# EAGLE board Eagle OSSM Ref Board PCB V1 (EAGLE 7.5.0)
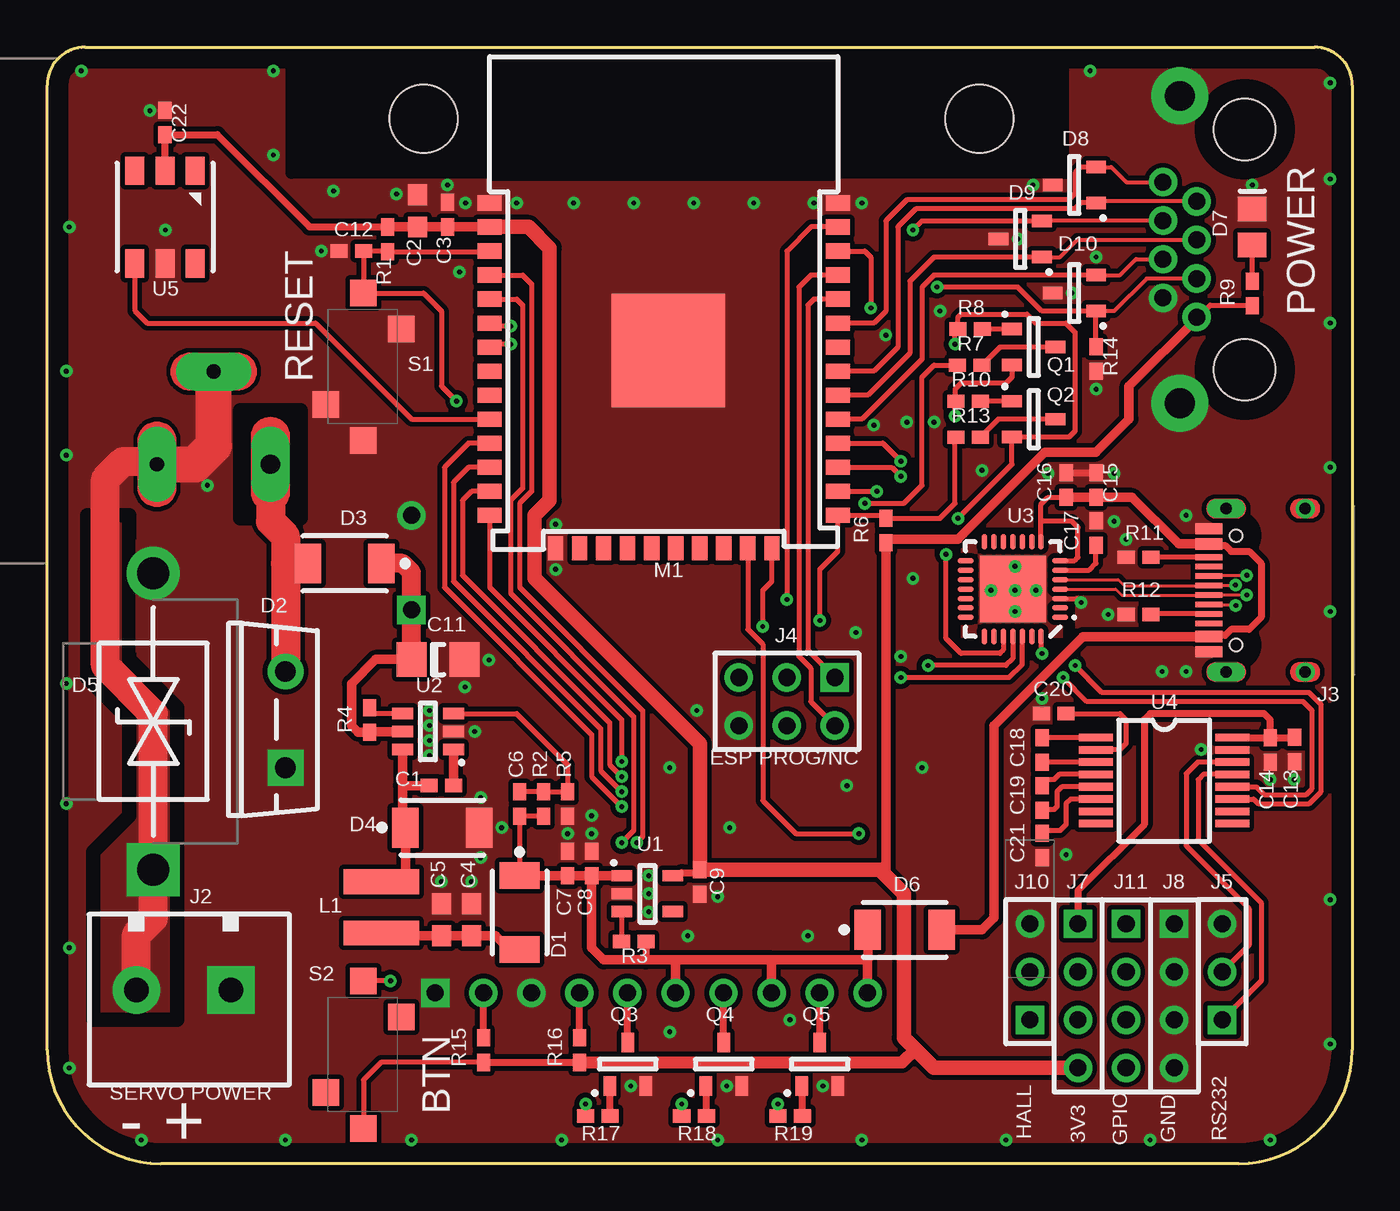
[diagram p0: board, top side]
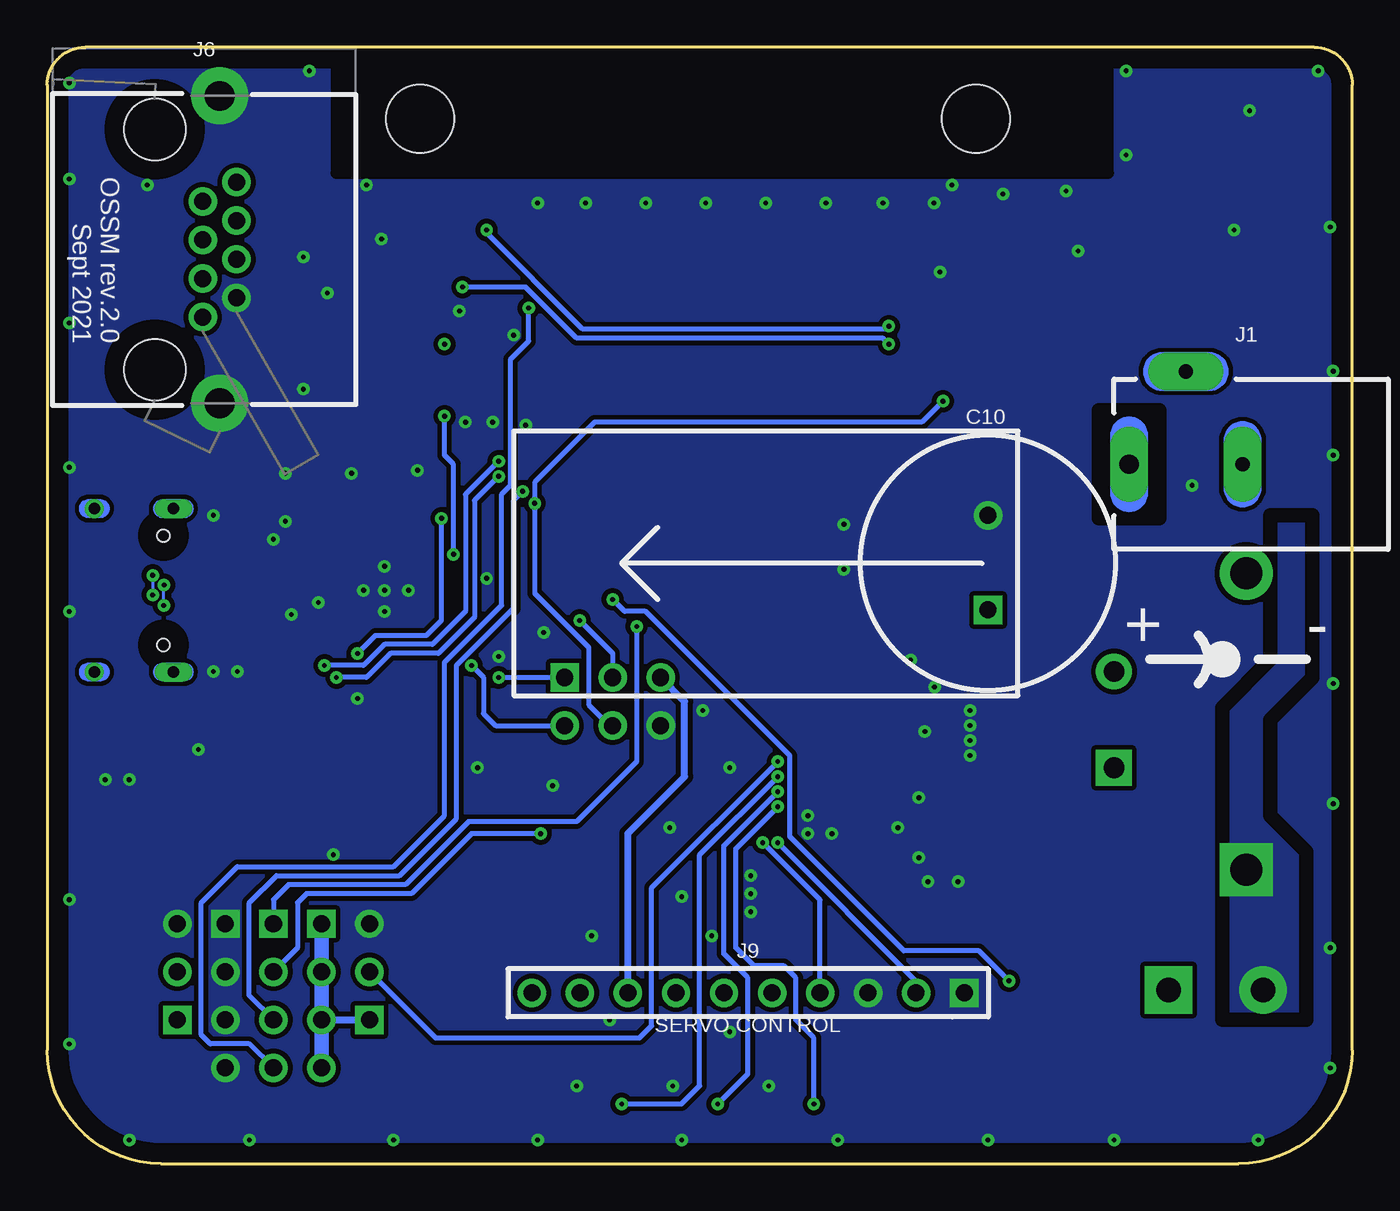
[diagram p1: board, bottom side, seen from below]

Size 69 x 59 mm. Coordinates in mm from the lower left corner, seen from the top.
Outline: 63,0 6,0 arc-90 0,6 0,57 arc-90 2,59 67,59 arc-90 69,57 69,6 arc-90 63,0
Outline: 63,0 63,0
Copper layers (1*16): Top 0.035mm / dielectric 1.5mm / Bottom 0.035mm
Design rules "default *": minimum track width 10mil, minimum drill 0.61mm, track to track 8mil, track to pad 8mil, pad to pad 8mil, via to via 8mil, smd to smd 8mil, copper to edge 40mil, drill to drill 8mil, minimum pad ring 0mil, minimum via ring 8mil, stop-mask expansion 1mil, vias tented up to drill 10mil, thermal gap 10mil
Net classes: 0 Default: width 0.102 mm, clearance 0.152 mm, clearance 0.152 mm to class 1; 1 USB_D: width 0.152 mm, clearance 0.152 mm, clearance 0.152 mm to class 0
Holes 3.6 mm at 19.9,55.22 49.3,55.22
tRestrict: 22 lines
bRestrict: 18 lines

## Footprints (pad centres in the part's own frame; a part is rotated, then mirrored left to right if it is on the bottom)
CAP_0402 = smd 0.9 x 0.7: 1 -0.65,0; 2 0.65,0
CAP_0603 = smd 1.1 x 1: 1 -0.85,0; 2 0.85,0
CAPR-5/13.5h22 = drill 0.9 pad 1.5 square: 1 -2.5,0 | drill 0.9 pad 1.5: 2 2.5,0
CAP_1206 = smd 1.6 x 1.8: 1 -1.4,0; 2 1.4,0
SMA = smd 1.4 x 2.1: 1 -1.95,0; 2 1.95,0
TO-220FP-2 = drill 1.1 pad 1.9 square: 1 -2.54,0 | drill 1.1 pad 1.9: 2 2.54,0
SMA_D3 = smd 1.4 x 2.1: 1 -1.95,0; 2 1.95,0
DO-201AD = drill 1.7 pad 2.8 square: 1 -7.832,0 | drill 1.7 pad 2.8: 2 7.832,0
DIO_0805 = smd 1.3 x 1.5: 1 -0.95,0; 2 0.95,0
SOT23 = smd 1.05 x 0.65: 1 -1.15,0.95; 2 -1.15,-0.95; 3 1.15,0
RAPC722X = drill 1.02 pad 2 long: 1 3,1.7 | drill 0.76 pad 2 long: 2 -3,1.7; 3 0,-3.2
TB-1x2/5/11x9/Sc_H = drill 1.3 pad 2.5 square: 1 -2.5,0 | drill 1.3 pad 2.5: 2 2.5,0
TYPE-C-31-M-12 = smd 0.6 x 1.45: A1B12 -3.25,5.095; A4B9 -2.45,5.095; B1A12 3.25,5.095; B4A9 2.45,5.095 | smd 0.3 x 1.45: A5 -1.25,5.095; A6 -0.25,5.095; A7 0.25,5.095; A8 1.25,5.095; B5 1.75,5.095; B6 0.75,5.095; B7 -0.75,5.095; B8 -1.75,5.095 | drill 0.6 pad 1: GND1 4.32,0; GND4 -4.32,0 | drill 0.6 pad 1 long: GND2 4.32,4.18; GND3 -4.32,4.18 | hole 0.65: -2.89,3.65; 2.89,3.65
HDR-2x3 = drill 0.9 pad 1.5 square: 1 -2.54,-1.27 | drill 0.9 pad 1.5: 2 -2.54,1.27; 3 0,-1.27; 4 0,1.27; 5 2.54,-1.27; 6 2.54,1.27
HDR-1x3 = drill 0.9 pad 1.5 square: 1 -2.54,0 | drill 0.9 pad 1.5: 2 0,0; 3 2.54,0
DS1128-06-S8B0P-X = drill 0.9 pad 1.5: 1 3.57,2.54; 2 2.55,4.32; 3 1.53,2.54; 4 0.51,4.32; 5 -0.51,2.54; 6 -1.53,4.32; 7 -2.55,2.54; 8 -3.57,4.32 | drill 1.57 pad 3: 9 -8.125,3.43; 10 8.125,3.43 | hole 3.25: -6.35,0; 6.35,0
HDR-1x4 = drill 0.9 pad 1.5 square: 1 -3.81,0 | drill 0.9 pad 1.5: 2 -1.27,0; 3 1.27,0; 4 3.81,0
HDR-1x10 = drill 0.9 pad 1.5 square: 1 -11.43,0 | drill 0.9 pad 1.5: 2 -8.89,0; 3 -6.35,0; 4 -3.81,0; 5 -1.27,0; 6 1.27,0; 7 3.81,0; 8 6.35,0; 9 8.89,0; 10 11.43,0
VLS4012E = smd 1.3 x 4: 1 -1.35,0; 2 1.35,0
ESP-WROOM-32 = smd 1.27 x 0.8: 1 -9.207,9.246; 2 -9.207,7.976; 3 -9.207,6.706; 4 -9.207,5.436; 5 -9.207,4.166; 6 -9.207,2.896; 7 -9.207,1.626; 8 -9.207,0.356; 9 -9.207,-0.914; 10 -9.207,-2.184; 11 -9.207,-3.454; 12 -9.207,-4.724; 13 -9.207,-5.994; 14 -9.207,-7.264; 25 9.207,-7.264; 26 9.207,-5.994; 27 9.207,-4.724; 28 9.207,-3.454; 29 9.207,-2.184; 30 9.207,-0.914; 31 9.207,0.356; 32 9.207,1.626; 33 9.207,2.896; 34 9.207,4.166; 35 9.207,5.436; 36 9.207,6.706; 37 9.207,7.976; 38 9.207,9.246 | smd 0.8 x 1.27: 15 -5.715,-9.011; 16 -4.445,-9.011; 17 -3.175,-9.011; 18 -1.905,-9.011; 19 -0.635,-9.011; 20 0.635,-9.011; 21 1.905,-9.011; 22 3.175,-9.011; 23 4.445,-9.011; 24 5.715,-9.011 | smd 6 x 6: 39 0.251,1.448
RES_0402 = smd 0.9 x 0.7: 1 -0.65,0; 2 0.65,0
Sunrom_1P1T_switch = smd 1.4 x 1.4: 1 -3.9,0; 2 3.9,0; 3 2,-2; 4 -2,2
SOT23-5 = smd 1.1 x 0.6: 1 -1.35,0.95; 2 -1.35,0; 3 -1.35,-0.95; 4 1.35,-0.95; 5 1.35,0.95
SOT23-6 = smd 1.1 x 0.6: 1 -1.35,0.95; 2 -1.35,0; 3 -1.35,-0.95; 4 1.35,-0.95; 5 1.35,0; 6 1.35,0.95
QFN-28/5x5x0.5 = smd 0.85 x 0.3: 1 -2.5,1.5; 2 -2.5,1; 3 -2.5,0.5; 4 -2.5,0; 5 -2.5,-0.5; 6 -2.5,-1; 7 -2.5,-1.5; 15 2.5,-1.5; 16 2.5,-1; 17 2.5,-0.5; 18 2.5,0; 19 2.5,0.5; 20 2.5,1; 21 2.5,1.5 | smd 0.3 x 0.85: 8 -1.5,-2.5; 9 -1,-2.5; 10 -0.5,-2.5; 11 0,-2.5; 12 0.5,-2.5; 13 1,-2.5; 14 1.5,-2.5; 22 1.5,2.5; 23 1,2.5; 24 0.5,2.5; 25 0,2.5; 26 -0.5,2.5; 27 -1,2.5; 28 -1.5,2.5 | smd 3.5 x 3.5: 29 0,0
SSOP-16 = smd 1.8 x 0.4: 1 -3.6,2.275; 2 -3.6,1.625; 3 -3.6,0.975; 4 -3.6,0.325; 5 -3.6,-0.325; 6 -3.6,-0.975; 7 -3.6,-1.625; 8 -3.6,-2.275; 9 3.6,-2.275; 10 3.6,-1.625; 11 3.6,-0.975; 12 3.6,-0.325; 13 3.6,0.325; 14 3.6,0.975; 15 3.6,1.625; 16 3.6,2.275
WS2813 = smd 1.5 x 1: 1 -2.45,1.6; 2 -2.45,0; 3 -2.45,-1.6; 4 2.45,-1.6; 5 2.45,0; 6 2.45,1.6

## Placement (x,y rotation side)
C1  100nF  [CAP_0402]  20.83,19.97 180 top
C2  10uF  [CAP_0603]  19.58,50.35 90 top
C3  100nF  [CAP_0402]  21.17,50.15 90 top
C4  10uF  [CAP_0603]  22.44,12.89 90 top
C5  10uF  [CAP_0603]  20.85,12.89 90 top
C6  22pF  [CAP_0402]  24.98,19.01 90 top
C7  1uF  [CAP_0402]  27.52,15.86 90 top
C8  100nF  [CAP_0402]  28.79,15.86 90 top
C9  1uF  [CAP_0402]  34.5,14.88 270 top
C10  1000uF/50V  [CAPR-5/13.5h22]  19.26,31.76 90 bottom
C11  470nF  [CAP_1206]  20.66,26.64 0 top
C12  10uF  [CAP_0402]  16.07,48.23 180 top
C13  1uF  [CAP_0402]  65.95,21.88 270 top
C14  100nF  [CAP_0402]  64.66,21.86 270 top
C15  1uF  [CAP_0402]  55.46,35.86 90 top
C16  100nF  [CAP_0402]  53.87,35.86 90 top
C17  100nF  [CAP_0402]  55.46,33.32 90 top
C18  100nF  [CAP_0402]  52.6,21.86 270 top
C19  100nF  [CAP_0402]  52.6,19.32 270 top
C20  100nF  [CAP_0402]  53.22,23.78 180 top
C21  100nF  [CAP_0402]  52.6,16.81 90 top
C22  1uF  [CAP_0402]  6.22,55.03 90 top
D1  B1100  [SMA]  24.98,13.26 270 top
D2  ST1060  [TO-220FP-2]  12.59,23.47 90 top
D3  B1100  [SMA_D3]  15.72,31.72 180 top
D4  B1100  [SMA_D3]  20.89,17.75 0 top
D5  42V CLAMP  [DO-201AD]  5.61,23.36 90 top
D6  B1100  [SMA_D3]  45.34,12.35 0 top
D7  POWER  [DIO_0805]  63.71,49.5 270 top
D8  PESD1CAN 215  [SOT23]  54.31,51.72 180 top
D9  PESD1CAN 215  [SOT23]  51.45,48.86 180 top
D10  PESD1CAN 215  [SOT23]  54.31,46.01 180 top
J1  24/36V IN  [RAPC722X]  8.8,38.66 180 bottom
J2  SERVO POWER  [TB-1x2/5/11x9/Sc_H]  7.21,9.17 180 top
J3  TYPE-C-31-M-12  [TYPE-C-31-M-12]  66.51,30.3 90 top
J4  ESP PROG/NC  [HDR-2x3]  39.1,24.42 180 top
J5  RS232  [HDR-1x3]  62.12,10.13 90 top
J6  RJ45  [DS1128-06-S8B0P-X]  63.32,48.31 270 bottom
J7  3V3  [HDR-1x4]  54.5,8.86 270 top
J8  GND  [HDR-1x4]  59.58,8.86 270 top
J9  SERVO CONTROL  [HDR-1x10]  31.95,9.01 180 bottom
J10  HALL  [HDR-1x3]  51.96,10.13 90 top
J11  GPIO  [HDR-1x4]  57.04,8.86 270 top
Keepout_1  1  [ROUTE_KEEPOUT_1]  33.31,55.53 0 top
Keepout_2  2  [ROUTE_KEEPOUT_2]  4.66,7.59 0 top
Keepout_3  3  [ROUTE_KEEPOUT_3]  6.88,15.85 0 top
Keepout_4  4  [ROUTE_KEEPOUT_4]  5.61,25.37 0 top
Keepout_5  5  [ROUTE_KEEPOUT_5]  4.34,30.45 0 top
Keepout_6  6  [ROUTE_KEEPOUT_6]  3.23,34.26 0 top
Keepout_7  7  [ROUTE_KEEPOUT_7]  2.12,29.98 0 top
Keepout_8  8  [ROUTE_KEEPOUT_8]  3.23,24.58 0 top
Keepout_9  9  [ROUTE_KEEPOUT_9]  4.34,20.93 0 top
Keepout_10  10  [ROUTE_KEEPOUT_10]  3.39,17.43 0 top
Keepout_11  11  [ROUTE_KEEPOUT_11]  2.43,12.04 0 top
Keepout_12  12  [ROUTE_KEEPOUT_12]  11.8,36.96 0 top
L1  10uH  [VLS4012E]  17.67,13.54 270 top
M1  ESP32-WROOM-32D  [ESP-WROOM-32]  32.6,41.53 0 top
Q1  BC817  [SOT23]  52.16,43.15 0 top
Q2  BC817  [SOT23]  52.16,39.34 0 top
Q3  BC817  [SOT23]  30.69,5.25 90 top
Q4  BC817  [SOT23]  35.77,5.25 90 top
Q5  BC817  [SOT23]  40.85,5.25 90 top
R1  10K  [RES_0402]  17.99,48.85 270 top
R2  54.9K  [RES_0402]  26.25,19.01 270 top
R3  10K  [RES_0402]  31.01,11.73 0 top
R4  10K  [RES_0402]  17.04,23.45 270 top
R5  10K  [RES_0402]  27.52,19.01 90 top
R6  10K  [RES_0402]  44.34,33.45 270 top
R7  100R  [RES_0402]  48.77,42.2 180 top
R8  10K  [RES_0402]  48.8,44.1 0 top
R9  220R  [RES_0402]  63.71,45.99 270 top
R10  10K  [RES_0402]  48.69,40.29 0 top
R11  5.1K  [RES_0402]  57.69,32.04 0 top
R12  5.1K  [RES_0402]  57.69,29.02 0 top
R13  100R  [RES_0402]  48.69,38.39 180 top
R14  10K  [RES_0402]  55.46,42.53 90 top
R15  10K  [RES_0402]  23.07,5.99 270 top
R16  10K  [RES_0402]  28.15,5.99 270 top
R17  220R  [RES_0402]  29.12,2.51 180 top
R18  220R  [RES_0402]  34.2,2.51 180 top
R19  220R  [RES_0402]  39.28,2.51 180 top
S1  K2-1107ST-A4SW-06  [Sunrom_1P1T_switch]  16.72,42.11 270 top
S2  K2-1107ST-A4SW-06  [Sunrom_1P1T_switch]  16.72,5.76 270 top
U1  ME6211C33  [SOT23-5]  31.72,14.26 0 top
U2  LMR14006  [SOT23-6]  20.13,22.83 180 top
U3  CP2102  [QFN-28/5x5x0.5]  51.05,30.36 180 top
U4  SP3232E  [SSOP-16]  59.06,20.24 0 top
U5  WS2813  [WS2813]  6.23,50.03 270 top

## Library data of the parts
C1-C9 C11-C22 D8-D10 J1-J5 J7 J8 J10 J11 Keepout_1-Keepout_12 R1-R19 U2-U5 = common
C10 = common; DESCRIPTION: Fixed Capacitor
D1-D4 D6 = common; ATTR_1: Schottky; DESCRIPTION: Diode
D5 = common; ATTR_1: Voltage Suppressor; DESCRIPTION: Diode
D7 = common; DESCRIPTION: LED
J6 = common; DATASHEET: http://datasheets.diptrace.com/con_jacks/43202.pdf; MANUFACTURER: Molex
J9 = common; DATASHEET: http://datasheets.diptrace.com/con_terminal_blocks/ostvnxxa150.pdf; MANUFACTURER: On Shore Technology
L1 = common; ATTR_1: Ferrite Core; ATTR_2: Fixed; DESCRIPTION: Inductor
M1 = common; MANUFACTURER: Espressif
Q1-Q5 = common; DESCRIPTION: Bipolar NPN
S1 S2 = common; ATTR_1: SPST; ATTR_2: Normally Open; DESCRIPTION: Switch
U1 = common; ALTERNATE: ME6211C

## Nets
!DIR: M1.12 R18.2
!ENA: M1.11 R17.2
!PUL: M1.13 R19.2
ALM: J9.2 M1.5 R15.1
ANA1: D10.1 J6.3 M1.7 R14.2
ANA2: D9.2 J6.6 M1.6
ESP_EN: C12.1 J4.4 M1.3 R1.2 R7.2 S1.1
ESP_RXD: J4.1 M1.34 U3.26
ESP_TXD: J4.2 M1.35 U3.25
GND: C2.2 C3.2 C4.2 C5.2 C7.2 C8.2 C9.2 C10.2 C11.2 C12.2 C13.2 C14.2 C15.2 C16.2 C17.2 C20.2 C21.1 C22.2 D4.2 D5.1 D7.1 D8.3 D9.3 D10.3 J1.2 J1.3 J2.2 J3.A1B12 J3.B1A12 J3.GND1 J3.GND2 J3.GND3 J3.GND4 J4.6 J5.3 J6.2 J6.9 J6.10 J8.1 J8.2 J8.3 J8.4 J9.1 J9.3 J10.3 M1.1 M1.15 M1.38 M1.39 Q3.2 Q4.2 Q5.2 R5.1 R11.1 R12.1 R14.1 S1.2 S1.3 S1.4 U1.2 U2.2 U3.3 U3.29 U4.15 U5.5
HALL: J10.2 M1.14
IO0: J4.3 M1.25 R6.1 R13.2
IO2: J11.1 M1.24
IO4: J11.3 M1.26
IO15: J11.2 M1.23
IO22: J11.4 M1.36
Net_0: D2.2 D3.2 J1.1
Net_3: C4.1 C5.1 D1.2 L1.2
Net_6: Q1.1 R8.2
Net_12: C17.1 U3.6
Net_23: Q2.1 R10.2
Net_24: R3.1 U1.3
Net_25: Q1.2 R10.1 U3.24
Net_26: Q2.2 R8.1 U3.28
Net_32: R4.1 U2.4
Net_33: C1.1 U2.1
Net_34: C1.2 D4.1 L1.1 U2.6
Net_35: C6.2 R2.1 R5.2 U2.3
Net_37: J9.9 Q5.3
Net_38: J9.7 Q4.3
Net_39: J9.5 Q3.3
Net_40: Q3.1 R17.1
Net_41: Q4.1 R18.1
Net_42: Q5.1 R19.1
Net_47: C18.1 U4.1
Net_48: C18.2 U4.3
Net_49: C19.1 U4.4
Net_50: C19.2 U4.5
Net_52: J5.1 U4.13
Net_53: J5.2 U4.14
Net_54: C20.1 U4.2
Net_60: D2.1 D5.2 J2.1
Net_61: C21.2 U4.6
Net_62: D7.2 R9.1
Net_74: J3.B5 R11.2
Net_75: J3.A5 R12.2
Net_76: Q2.3 R13.1
Net_77: Q1.3 R7.1
PED: J9.4 M1.4 R16.1
REM_GPIO1: D10.2 J6.4 M1.29
REM_GPIO2: D9.1 J6.5 M1.30
REM_I2C_SCL: D8.1 J6.7 M1.31
REM_I2C_SDA: D8.2 J6.8 M1.33
RGB: M1.10 U5.4
RS232_RXD: M1.27 U4.12
RS232_TXD: M1.28 U4.11
SW: M1.37 S2.1
USB_D_N [USB_D]: J3.A7 J3.B7 U3.5
USB_D_P [USB_D]: J3.A6 J3.B6 U3.4
VDD_3V3: C2.1 C3.1 C9.1 C13.1 C14.1 C22.1 J6.1 J7.1 J7.2 J7.3 J7.4 J10.1 M1.2 R1.1 R6.2 R9.2 R15.2 R16.2 S2.2 U1.5 U4.16 U5.2
VDD_5V0: C6.1 C7.1 C8.1 D1.1 D6.1 J4.5 J9.6 J9.8 J9.10 R2.2 R3.2 U1.1
VDD_36V: C10.1 C11.1 D3.1 R4.2 U2.5
VDD_USB: C15.1 C16.1 D6.2 J3.A4B9 J3.B4A9 U3.7 U3.8

## Tracks (layer width: path | path; a pad name or v marks a point on that pad's centre or on a via)
!DIR  (via drill 0.25 pad 0.56)
  Top 0.254: M1.12 22.28,36.8 21.48,36.01 21.48,30.77 29.26,22.99 29.26,20.77 v30.37,19.66 | v33.55,3.15 R18.2
  Bottom 0.254: v33.55,3.15 31.96,4.74 31.96,9.81 33.23,11.08 33.23,16.8 v30.37,19.66
!ENA  (via drill 0.25 pad 0.56)
  Top 0.254: M1.11 22.28,38.07 21.01,36.8 21.01,30.45 28.79,22.67 28.79,20.45 v30.37,18.86 | v28.47,3.15 R17.2
  Bottom 0.254: v28.47,3.15 28.47,6.64 29.42,7.59 29.42,9.81 30.06,10.45 31.64,10.45 32.6,11.4 32.6,16.64 v30.37,18.86
!PUL  (via drill 0.25 pad 0.56)
  Top 0.254: M1.13 22.44,35.53 21.96,35.06 21.96,31.09 29.74,23.31 29.74,21.09 v30.37,20.45 | v38.63,3.15 R19.2
  Bottom 0.254: v38.63,3.15 35.45,3.15 34.5,4.1 34.5,16.32 v30.37,20.45
ALM  (via drill 0.25 pad 0.56)
  Top 0.254: M1.5 24.82,45.69 25.13,45.38 25.13,35.69 24.5,35.06 24.5,30.14 31.01,23.63 31.01,17.59 v30.37,16.96
  Top 0.381: R15.1 J9.2
  Bottom 0.254: J9.2 23.06,9.64 v30.37,16.96
ANA1  (via drill 0.25 pad 0.56)
  Top 0.203: J6.3 58.13,46.78 56.41,45.06 D10.1
  Top 0.254: v24.5,43.31 23.39,43.31 M1.7 | v47.04,46.33 51.33,46.33 52.6,45.06 D10.1 R14.2
  Bottom 0.254: v24.5,43.31 24.82,43.63 41.01,43.63 43.71,46.33 v47.04,46.33
ANA2  (via drill 0.25 pad 0.56)
  Top 0.203: J6.6 52.62,49.84 D9.2
  Top 0.254: v24.5,44.26 23.39,44.26 M1.6 | D9.2 46.24,49.82 v45.77,49.34
  Bottom 0.254: v24.5,44.26 24.5,44.11 40.69,44.11 45.93,49.34 v45.77,49.34
ESP_EN  (via drill 0.25 pad 0.56)
  Top 0.254: M1.3 23.36,48.2 R1.2 17.99,48.23 C12.1 S1.1 19.9,46.01 20.85,45.06 20.85,41.09 v21.64,40.29 | v43.23,34.9 45.3,34.9 46.25,35.85 46.25,41.57 46.88,42.2 R7.2
  Bottom 0.254: J4.4 39.1,22.99 40.37,24.26 40.37,27.28 43.23,30.14 v43.23,34.9 43.23,36.01 40.06,39.18 22.75,39.18 v21.64,40.29
ESP_RXD  (via drill 0.25 pad 0.56)
  Top 0.254: M1.34 40.53,45.69 40.22,45.38 40.22,27.12 J4.1 | v45.14,25.69 | v45.14,25.69 50.85,25.69 51.55,26.39 U3.26
  Bottom 0.254: v45.14,25.69 J4.1 | J4.1
ESP_TXD  (via drill 0.25 pad 0.56)
  Top 0.254: M1.35 40.37,46.96 39.74,46.33 39.74,26.8 40.37,26.17 40.37,24.42 J4.2 | U3.25 51.05,26.68 50.69,26.32 v46.56,26.32
  Bottom 0.254: v46.56,26.32 45.93,25.69 45.93,23.78 45.3,23.15 J4.2
GND  (via drill 0.25 pad 0.56)
  Top 0.254: U3.3 54.45,29.86 v54.66,29.66
  Top 0.381: C16.2 C15.2
  Top 0.508: U3.29 | U3.29 v51.17,30.29 | v51.17,30.29
  Top 1.524: J1.2 5.64,37.12 4.02,37.12 3.07,36.17 3.07,26.32 5.61,23.78 D5.1 5.61,12.99 4.71,12.09 J2.2
  Top 1.905: J1.2 7.83,36.96 8.8,37.93 J1.3
  other vias: 52.12,51.72 54.19,46.01 51.33,48.87 20.21,21.56 20.21,22.36 20.21,23.15 20.21,23.94 22.44,14.89 20.85,14.89 22.91,16.16 24.02,17.75 22.91,19.34 22.59,22.83 31.8,15.21 31.8,14.26 31.8,13.31 28.79,18.39 34.34,23.94 33.87,12.04 27.52,17.43 28.79,17.43 14.5,48.23 18.47,51.25 21.17,51.72 57.04,32.99 56.09,29.02 56.41,36.48 52.92,36.48 52.28,30.29 51.17,31.56 51.17,29.18 49.9,30.29 56.41,33.94 35.93,4.1 41.01,4.1 30.85,4.1 55.46,47.91 5.42,55.65 6.24,49.34 44.34,43.79 22.12,50.77 64.66,20.29 65.93,20.29 52.6,24.58 53.87,16.32 61.01,21.88 23.36,26.61 22.09,25.18 55.46,40.93 26.88,33.79 26.88,31.4 43.07,50.77 40.53,50.77 45.14,26.8 42.28,19.97 42.76,28.07 45.77,30.93 45.45,39.18 46.88,39.18 49.42,36.64 47.2,45.06 21.8,47.12 24.82,50.77 43.71,39.02 1.8,57.76 1.16,49.5 1,41.88 1,37.44 1,25.37 1,19.02 1.16,11.4 1.16,5.05 11.96,57.76 11.96,53.31 15.13,51.41 8.47,35.85 4.97,1.24 12.59,1.24 19.26,1.24 27.2,1.24 35.45,1.24 43.07,1.24 50.69,1.24 58.31,1.24 64.66,1.24 67.84,6.32 67.84,13.94 27.83,50.77 67.84,29.18 67.84,36.8 67.84,44.42 67.84,52.04 67.84,57.12 31.01,50.77 34.18,50.77 37.36,50.77 46.25,20.93 60.22,34.26 60.22,26.01 58.95,26.01 32.91,6.96 39.26,7.59 55.14,57.76 32.91,20.93 40.22,12.04 63.71,51.72 36.09,17.75 35.45,14.1
  pour Bottom (isolate 0.254): 62.98,0.63 6.03,0.63 5.16,0.7 4.34,0.9 3.57,1.22 2.85,1.66 2.21,2.21 1.66,2.85 1.22,3.56 0.9,4.34 0.7,5.16 0.64,6.02 0.64,56.96 0.69,57.35 0.82,57.68 1.04,57.96 1.32,58.18 1.65,58.31 2.04,58.36 66.96,58.36 67.35,58.31 67.68,58.18 67.96,57.96 68.18,57.68 68.31,57.35 68.37,56.96 68.37,6.02 68.3,5.16 68.1,4.34 67.78,3.56 67.34,2.85 66.79,2.21 66.15,1.66 65.44,1.22 64.66,0.9 63.84,0.7
  pour Top (isolate 0.254): 62.98,0.63 6.03,0.63 5.16,0.7 4.34,0.9 3.57,1.22 2.85,1.66 2.21,2.21 1.66,2.85 1.22,3.56 0.9,4.34 0.7,5.16 0.64,6.02 0.64,56.96 0.69,57.35 0.82,57.68 1.04,57.96 1.32,58.18 1.65,58.31 2.04,58.36 66.96,58.36 67.35,58.31 67.68,58.18 67.96,57.96 68.18,57.68 68.31,57.35 68.37,56.96 68.37,6.02 68.3,5.16 68.1,4.34 67.78,3.56 67.34,2.85 66.79,2.21 66.15,1.66 65.44,1.22 64.66,0.9 63.84,0.7
HALL  (via drill 0.25 pad 0.56)
  Top 0.254: M1.14 23.39,30.45 30.37,23.47 v30.37,21.25
  Bottom 0.254: J10.2 48.47,6.64 37.67,6.64 37.04,7.28 37.04,14.58 v30.37,21.25
IO0  (via drill 0.25 pad 0.56)
  Top 0.254: R13.2 47.99,38.35 47.99,34.9 47.2,34.1 R6.1 44.34,34.26 M1.25 41.8,32.36 40.85,31.41 v40.85,28.71
  Bottom 0.254: v40.85,28.71 | v40.85,28.71 39.1,26.96 J4.3
IO2  (via drill 0.25 pad 0.56)
  Top 0.254: v37.83,28.39 37.83,30.29 38.31,30.77 M1.24
  Bottom 0.254: v37.83,28.39 | v37.83,28.39 37.83,21.25 41.01,18.07 46.72,18.07 50.06,14.74 56.25,14.74 57.04,13.94 J11.1
IO4  (via drill 0.25 pad 0.56)
  Top 0.254: M1.26 v43.87,35.53 | v43.87,35.53
  Bottom 0.254: J11.3 58.31,8.86 58.31,13.78 56.88,15.21 50.38,15.21 47.36,18.23 47.36,26.32 44.34,29.34 44.34,35.06 v43.87,35.53
IO15  (via drill 0.25 pad 0.56)
  Top 0.254: M1.23 37.04,28.23 37.83,27.44 37.83,19.18 39.58,17.43 v42.91,17.43
  Bottom 0.254: v42.91,17.43 46.56,17.43 49.74,14.26 55.3,14.26 55.77,13.78 55.77,11.4 J11.2
IO22  (via drill 0.25 pad 0.56)
  Top 0.254: M1.36 43.23,48.23 43.55,47.91 v43.55,45.22
  Bottom 0.254: J11.4 58.31,6.32 60.38,6.32 60.85,6.8 60.85,13.78 58.95,15.69 50.69,15.69 47.99,18.39 47.99,26.48 44.98,29.5 44.98,35.37 44.5,35.85 44.5,42.52 43.55,43.47 v43.55,45.22
Net_0
  Top 1.016: D3.2 12.59,31.72
  Top 1.524: J1.1 11.8,33.95 12.59,33.15 12.59,31.72 D2.2
Net_3
  Top 0.508: L1.2 17.83,12.04 C5.1 C4.1 | C4.1 | C4.1 23.71,12.04 24.43,11.31 D1.2
Net_6
  Top 0.254: Q1.1 R8.2 | R8.2
Net_12
  Top 0.254: U3.6 55.1,31.36 55.45,31.72 C17.1
Net_23
  Top 0.254: Q2.1 R10.2 | R10.2
Net_24
  Top 0.254: U1.3 30.37,11.75 R3.1
Net_25  (via drill 0.25 pad 0.56)
  Top 0.254: Q1.2 51.01,41.56 50.69,41.25 48.31,41.25 47.99,40.93 47.99,40.34 R10.1 47.99,40.25 v47.99,39.5 | U3.24 50.55,27.13 50.38,26.96 48.31,26.96 47.52,27.75 v47.52,32.2
  Bottom 0.254: v47.52,32.2 47.52,36.96 47.99,37.44 v47.99,39.5
Net_26  (via drill 0.25 pad 0.56)
  Top 0.254: v47.99,43.31 47.99,43.95 R8.1 48.15,44.74 48.31,44.9 51.8,44.9 52.28,44.42 53.87,44.42 54.34,43.95 54.34,38.71 54.03,38.39 Q2.2 51.01,36.96 v48.15,34.1 | U3.28 52.55,27.01 v52.6,26.96
  Bottom 0.254: v52.6,26.96 51.65,27.91 48.95,27.91 48.15,28.71 v48.15,34.1
Net_32
  Top 0.254: U2.4 17.36,23.78 R4.1
Net_33
  Top 0.508: C1.1 U2.1
Net_34
  Top 0.508: U2.6 18.78,19.98 | 18.78,19.98 18.78,17.91 D4.1 18.94,15.21 18.63,14.89 L1.1 | C1.2 18.78,19.98
Net_35
  Top 0.254: C6.2 R2.1 R5.2 | C6.2 | R5.2 | U2.3 24.82,23.78 27.52,21.09 R5.2
Net_37
  Top 0.381: Q5.3 40.85,9 J9.9
Net_38
  Top 0.381: Q4.3 35.77,9 J9.7
Net_39
  Top 0.381: Q3.3 30.69,9 J9.5
Net_40
  Top 0.381: R17.1 29.77,4.1 Q3.1
Net_41
  Top 0.381: R18.1 34.85,4.1 Q4.1
Net_42
  Top 0.381: R19.1 39.93,4.1 Q5.1
Net_47
  Top 0.254: U4.1 C18.1 | C18.1
Net_48
  Top 0.254: U4.3 C18.2 | C18.2
Net_49
  Top 0.254: U4.4 53.51,20.57 53.23,20.29 52.6,20.29 C19.1
Net_50
  Top 0.254: U4.5 53.65,19.91 53.39,19.66 53.39,18.86 53.23,18.71 52.63,18.71 C19.2
Net_52
  Top 0.254: U4.13 61.13,20.57 60.85,20.29 60.85,17.12 64.19,13.78 64.19,9.66 J5.1
Net_53
  Top 0.254: U4.14 60.82,21.21 60.22,20.61 60.22,16.8 63.55,13.47 63.55,11.56 J5.2
Net_54
  Top 0.254: C20.1 56.73,23.78 57.04,23.47 57.04,22.2 56.71,21.86 U4.2
Net_60
  pour Top (isolate 0.203): 4.44,32.89 9.95,32.89 9.95,23.47 9.96,23.43 9.98,23.4 10.01,23.37 10.05,23.37 14.4,23.37 14.4,7.69 7.61,7.69 7.61,24.79 4.44,27.33
Net_61
  Top 0.254: U4.6 54.11,19.27 53.87,19.02 53.87,17.91 53.55,17.59 52.73,17.59 C21.2
Net_62
  Top 0.254: R9.1 D7.2
Net_74
  Top 0.254: J3.B5 R11.2
Net_75
  Top 0.254: J3.A5 58.37,29.05 R12.2
Net_76
  Top 0.254: Q2.3 50.29,39.34 R13.1
Net_77
  Top 0.254: Q1.3 50.38,43.15 R7.1
PED  (via drill 0.25 pad 0.56)
  Top 0.254: M1.4 25.13,46.96 25.61,46.49 25.61,35.53 24.98,34.9 24.98,30.45 31.48,23.94 31.48,17.28 v31.17,16.96
  Top 0.381: R16.1 28.15,9 J9.4
  Bottom 0.254: J9.4 28.14,13.93 v31.17,16.96
REM_GPIO1
  Top 0.203: D10.2 56.72,46.96 57.56,47.8 J6.4
  Top 0.254: D10.2 46.88,46.96 46.25,46.33 46.25,42.52 43.07,39.34 M1.29
REM_GPIO2
  Top 0.203: D9.1 53.55,47.91 54.45,48.82 J6.5
  Top 0.254: D9.1 46.88,47.91 45.61,46.64 45.61,42.83 43.39,40.61 M1.30
REM_I2C_SCL
  Top 0.203: J6.7 55.54,50.86 D8.1
  Top 0.254: D8.1 54.66,50.77 54.34,50.45 45.93,50.45 44.98,49.5 44.98,43.15 43.71,41.88 M1.31
REM_I2C_SDA
  Top 0.203: D8.2 56.25,52.67 57.05,51.88 J6.8
  Top 0.254: D8.2 54.66,52.67 54.34,52.36 54.34,51.25 54.03,50.93 45.45,50.93 44.34,49.82 44.34,45.06 43.71,44.42 M1.33
RGB
  Top 0.254: U5.4 4.63,45.08 5.29,44.42 14.18,44.42 19.26,39.34 M1.10
RS232_RXD  (via drill 0.25 pad 0.56)
  Top 0.254: U4.12 63.93,19.91 64.35,19.5 66.57,19.5 66.89,19.82 66.89,23.94 66.41,24.42 54.98,24.42 v53.71,25.69 | M1.27 44.66,36.8 v45.14,36.33
  Bottom 0.254: v45.14,36.33 46.41,35.06 46.41,28.86 48.31,26.96 50.85,26.96 52.12,25.69 v53.71,25.69
RS232_TXD  (via drill 0.25 pad 0.56)
  Top 0.254: U4.11 63.79,19.27 64.03,19.02 66.73,19.02 67.36,19.66 67.36,24.26 66.73,24.9 55.77,24.9 v54.34,26.32 | M1.28 44.18,38.07 v45.14,37.12
  Bottom 0.254: v45.14,37.12 46.88,35.37 46.88,29.18 48.63,27.44 51.17,27.44 52.28,26.32 v54.34,26.32
SW  (via drill 0.25 pad 0.56)
  Top 0.254: M1.37 40.37,49.5 39.1,48.23 v39.1,29.82 | v18.15,9.66 S2.1 | S2.1
  Bottom 0.254: v18.15,9.66 19.74,11.24 23.71,11.24 29.74,17.28 29.74,21.56 37.36,29.18 38.47,29.18 v39.1,29.82
USB_D_N  (via drill 0.25 pad 0.56)
  Top 0.152: U3.5 56.63,30.86 56.95,30.55 J3.A7 61.43,30.53 62.77,30.53 v62.82,30.58 | v62.84,29.5 61.47,29.5 J3.B7
  Bottom 0.152: v62.84,29.5 62.84,30.56 v62.82,30.58
USB_D_P  (via drill 0.25 pad 0.56)
  Top 0.152: U3.4 56.49,30.36 56.81,30.05 J3.A6 v63.42,30.05 | J3.B6 61.42,31.09 v63.42,31.09
  Bottom 0.152: v63.42,31.09 v63.42,30.05 | v63.42,30.05 | v63.42,30.05 | v63.42,30.05 | v63.42,30.05 | v63.42,30.05 | v63.42,30.05 | v63.42,30.05 | v63.42,30.05 | v63.42,30.05 | v63.42,30.05 | v63.42,30.05 | v63.42,30.05 | v63.42,30.05 | v63.42,30.05 | v63.42,30.05 | v63.42,30.05 | v63.42,30.05 | v63.42,30.05 | v63.42,30.05 | v63.42,30.05 | v63.42,30.05 | v63.42,30.05 | v63.42,30.05 | v63.42,30.05 | v63.42,30.05 | v63.42,30.05 | v63.42,30.05 | v63.42,30.05 | v63.42,30.05 | v63.42,30.05 | v63.42,30.05 | v63.42,30.05 | v63.42,30.05 | v63.42,30.05 | v63.42,30.05 | v63.42,30.05 | v63.42,30.05 | v63.42,30.05 | v63.42,30.05 | v63.42,30.05 | v63.42,30.05 | v63.42,30.05 | v63.42,30.05 | v63.42,30.05 | v63.42,30.05 | v63.42,30.05 | v63.42,30.05 | v63.42,30.05 | v63.42,30.05 | v63.42,30.05 | v63.42,30.05 | v63.42,30.05 | v63.42,30.05 | v63.42,30.05 | v63.42,30.05 | v63.42,30.05 | v63.42,30.05 | v63.42,30.05 | v63.42,30.05 | v63.42,30.05 | v63.42,30.05 | v63.42,30.05 | v63.42,30.05 | v63.42,30.05 | v63.42,30.05 | v63.42,30.05 | v63.42,30.05 | v63.42,30.05 | v63.42,30.05 | v63.42,30.05 | v63.42,30.05 | v63.42,30.05 | v63.42,30.05 | v63.42,30.05 | v63.42,30.05 | v63.42,30.05 | v63.42,30.05 | v63.42,30.05 | v63.42,30.05 | v63.42,30.05 | v63.42,30.05 | v63.42,30.05 | v63.42,30.05 | v63.42,30.05 | v63.42,30.05 | v63.42,30.05 | v63.42,30.05 | v63.42,30.05 | v63.42,30.05 | v63.42,30.05 | v63.42,30.05 | v63.42,30.05 | v63.42,30.05 | v63.42,30.05 | v63.42,30.05 | v63.42,30.05 | v63.42,30.05 | v63.42,30.05 | v63.42,30.05 | v63.42,30.05 | v63.42,30.05 | v63.42,30.05 | v63.42,30.05 | v63.42,30.05 | v63.42,30.05 | v63.42,30.05 | v63.42,30.05 | v63.42,30.05 | v63.42,30.05 | v63.42,30.05 | v63.42,30.05 | v63.42,30.05 | v63.42,30.05 | v63.42,30.05 | v63.42,30.05 | v63.42,30.05 | v63.42,30.05 | v63.42,30.05 | v63.42,30.05 | v63.42,30.05 | v63.42,30.05 | v63.42,30.05 | v63.42,30.05
  Bottom 0.152: v63.42,30.05 | v63.42,30.05 | v63.42,30.05 | v63.42,30.05 | v63.42,30.05 | v63.42,30.05 | v63.42,30.05 | v63.42,30.05 | v63.42,30.05 | v63.42,30.05 | v63.42,30.05 | v63.42,30.05 | v63.42,30.05 | v63.42,30.05 | v63.42,30.05 | v63.42,30.05 | v63.42,30.05 | v63.42,30.05 | v63.42,30.05 | v63.42,30.05 | v63.42,30.05 | v63.42,30.05 | v63.42,30.05 | v63.42,30.05 | v63.42,30.05 | v63.42,30.05 | v63.42,30.05 | v63.42,30.05 | v63.42,30.05 | v63.42,30.05 | v63.42,30.05 | v63.42,30.05 | v63.42,30.05 | v63.42,30.05 | v63.42,30.05 | v63.42,30.05 | v63.42,30.05 | v63.42,30.05 | v63.42,30.05 | v63.42,30.05 | v63.42,30.05 | v63.42,30.05 | v63.42,30.05 | v63.42,30.05 | v63.42,30.05 | v63.42,30.05 | v63.42,30.05 | v63.42,30.05 | v63.42,30.05 | v63.42,30.05 | v63.42,30.05 | v63.42,30.05 | v63.42,30.05 | v63.42,30.05 | v63.42,30.05 | v63.42,30.05 | v63.42,30.05 | v63.42,30.05 | v63.42,30.05 | v63.42,30.05 | v63.42,30.05 | v63.42,30.05 | v63.42,30.05 | v63.42,30.05 | v63.42,30.05 | v63.42,30.05 | v63.42,30.05 | v63.42,30.05 | v63.42,30.05 | v63.42,30.05 | v63.42,30.05 | v63.42,30.05 | v63.42,30.05 | v63.42,30.05 | v63.42,30.05 | v63.42,30.05 | v63.42,30.05 | v63.42,30.05 | v63.42,30.05 | v63.42,30.05 | v63.42,30.05 | v63.42,30.05 | v63.42,30.05 | v63.42,30.05 | v63.42,30.05 | v63.42,30.05 | v63.42,30.05 | v63.42,30.05 | v63.42,30.05 | v63.42,30.05 | v63.42,30.05 | v63.42,30.05 | v63.42,30.05 | v63.42,30.05 | v63.42,30.05 | v63.42,30.05 | v63.42,30.05 | v63.42,30.05 | v63.42,30.05 | v63.42,30.05 | v63.42,30.05 | v63.42,30.05 | v63.42,30.05 | v63.42,30.05 | v63.42,30.05 | v63.42,30.05 | v63.42,30.05 | v63.42,30.05 | v63.42,30.05 | v63.42,30.05 | v63.42,30.05 | v63.42,30.05 | v63.42,30.05 | v63.42,30.05 | v63.42,30.05 | v63.42,30.05 | v63.42,30.05 | v63.42,30.05 | v63.42,30.05 | v63.42,30.05 | v63.42,30.05 | v63.42,30.05 | v63.42,30.05 | v63.42,30.05 | v63.42,30.05 | v63.42,30.05
  Bottom 0.152: v63.42,30.05 | v63.42,30.05 | v63.42,30.05 | v63.42,30.05 | v63.42,30.05 | v63.42,30.05 | v63.42,30.05 | v63.42,30.05 | v63.42,30.05 | v63.42,30.05 | v63.42,30.05 | v63.42,30.05 | v63.42,30.05 | v63.42,30.05 | v63.42,30.05 | v63.42,30.05 | v63.42,30.05 | v63.42,30.05 | v63.42,30.05 | v63.42,30.05 | v63.42,30.05 | v63.42,30.05 | v63.42,30.05 | v63.42,30.05 | v63.42,30.05 | v63.42,30.05 | v63.42,30.05 | v63.42,30.05 | v63.42,30.05 | v63.42,30.05 | v63.42,30.05 | v63.42,30.05 | v63.42,30.05 | v63.42,30.05 | v63.42,30.05 | v63.42,30.05 | v63.42,30.05 | v63.42,30.05 | v63.42,30.05 | v63.42,30.05 | v63.42,30.05 | v63.42,30.05 | v63.42,30.05 | v63.42,30.05 | v63.42,30.05 | v63.42,30.05 | v63.42,30.05 | v63.42,30.05 | v63.42,30.05 | v63.42,30.05 | v63.42,30.05 | v63.42,30.05 | v63.42,30.05 | v63.42,30.05 | v63.42,30.05 | v63.42,30.05 | v63.42,30.05 | v63.42,30.05 | v63.42,30.05 | v63.42,30.05 | v63.42,30.05 | v63.42,30.05 | v63.42,30.05 | v63.42,30.05 | v63.42,30.05 | v63.42,30.05 | v63.42,30.05 | v63.42,30.05 | v63.42,30.05 | v63.42,30.05 | v63.42,30.05 | v63.42,30.05 | v63.42,30.05 | v63.42,30.05 | v63.42,30.05 | v63.42,30.05 | v63.42,30.05 | v63.42,30.05 | v63.42,30.05 | v63.42,30.05 | v63.42,30.05 | v63.42,30.05 | v63.42,30.05 | v63.42,30.05 | v63.42,30.05 | v63.42,30.05 | v63.42,30.05 | v63.42,30.05 | v63.42,30.05 | v63.42,30.05 | v63.42,30.05 | v63.42,30.05 | v63.42,30.05 | v63.42,30.05 | v63.42,30.05 | v63.42,30.05 | v63.42,30.05 | v63.42,30.05 | v63.42,30.05 | v63.42,30.05 | v63.42,30.05 | v63.42,30.05 | v63.42,30.05 | v63.42,30.05 | v63.42,30.05 | v63.42,30.05 | v63.42,30.05 | v63.42,30.05 | v63.42,30.05 | v63.42,30.05 | v63.42,30.05 | v63.42,30.05 | v63.42,30.05 | v63.42,30.05 | v63.42,30.05 | v63.42,30.05 | v63.42,30.05 | v63.42,30.05 | v63.42,30.05 | v63.42,30.05 | v63.42,30.05 | v63.42,30.05 | v63.42,30.05 | v63.42,30.05 | v63.42,30.05 | v63.42,30.05
  Bottom 0.152: v63.42,30.05 | v63.42,30.05 | v63.42,30.05 | v63.42,30.05 | v63.42,30.05 | v63.42,30.05 | v63.42,30.05 | v63.42,30.05 | v63.42,30.05 | v63.42,30.05 | v63.42,30.05 | v63.42,30.05 | v63.42,30.05 | v63.42,30.05 | v63.42,30.05 | v63.42,30.05 | v63.42,30.05 | v63.42,30.05 | v63.42,30.05 | v63.42,30.05 | v63.42,30.05 | v63.42,30.05 | v63.42,30.05 | v63.42,30.05 | v63.42,30.05 | v63.42,30.05 | v63.42,30.05 | v63.42,30.05 | v63.42,30.05 | v63.42,30.05 | v63.42,30.05 | v63.42,30.05 | v63.42,30.05 | v63.42,30.05 | v63.42,30.05 | v63.42,30.05 | v63.42,30.05 | v63.42,30.05 | v63.42,30.05 | v63.42,30.05 | v63.42,30.05 | v63.42,30.05 | v63.42,30.05 | v63.42,30.05 | v63.42,30.05 | v63.42,30.05 | v63.42,30.05 | v63.42,30.05 | v63.42,30.05 | v63.42,30.05 | v63.42,30.05 | v63.42,30.05 | v63.42,30.05 | v63.42,30.05 | v63.42,30.05 | v63.42,30.05 | v63.42,30.05 | v63.42,30.05 | v63.42,30.05 | v63.42,30.05 | v63.42,30.05 | v63.42,30.05 | v63.42,30.05 | v63.42,30.05 | v63.42,30.05 | v63.42,30.05 | v63.42,30.05 | v63.42,30.05 | v63.42,30.05 | v63.42,30.05 | v63.42,30.05 | v63.42,30.05 | v63.42,30.05 | v63.42,30.05 | v63.42,30.05 | v63.42,30.05 | v63.42,30.05 | v63.42,30.05 | v63.42,30.05 | v63.42,30.05 | v63.42,30.05 | v63.42,30.05 | v63.42,30.05 | v63.42,30.05 | v63.42,30.05 | v63.42,30.05 | v63.42,30.05 | v63.42,30.05 | v63.42,30.05 | v63.42,30.05 | v63.42,30.05 | v63.42,30.05 | v63.42,30.05 | v63.42,30.05 | v63.42,30.05 | v63.42,30.05 | v63.42,30.05 | v63.42,30.05 | v63.42,30.05 | v63.42,30.05 | v63.42,30.05 | v63.42,30.05 | v63.42,30.05 | v63.42,30.05 | v63.42,30.05 | v63.42,30.05 | v63.42,30.05 | v63.42,30.05 | v63.42,30.05 | v63.42,30.05 | v63.42,30.05 | v63.42,30.05 | v63.42,30.05 | v63.42,30.05 | v63.42,30.05 | v63.42,30.05 | v63.42,30.05 | v63.42,30.05 | v63.42,30.05 | v63.42,30.05 | v63.42,30.05 | v63.42,30.05 | v63.42,30.05 | v63.42,30.05 | v63.42,30.05 | v63.42,30.05
  Bottom 0.152: v63.42,30.05 | v63.42,30.05 | v63.42,30.05 | v63.42,30.05 | v63.42,30.05 | v63.42,30.05 | v63.42,30.05 | v63.42,30.05 | v63.42,30.05 | v63.42,30.05 | v63.42,30.05 | v63.42,30.05 | v63.42,30.05 | v63.42,30.05 | v63.42,30.05 | v63.42,30.05 | v63.42,30.05 | v63.42,30.05 | v63.42,30.05 | v63.42,30.05 | v63.42,30.05 | v63.42,30.05 | v63.42,30.05 | v63.42,30.05 | v63.42,30.05 | v63.42,30.05 | v63.42,30.05 | v63.42,30.05 | v63.42,30.05 | v63.42,30.05 | v63.42,30.05 | v63.42,30.05 | v63.42,30.05 | v63.42,30.05 | v63.42,30.05 | v63.42,30.05 | v63.42,30.05 | v63.42,30.05 | v63.42,30.05 | v63.42,30.05 | v63.42,30.05 | v63.42,30.05 | v63.42,30.05 | v63.42,30.05 | v63.42,30.05 | v63.42,30.05 | v63.42,30.05 | v63.42,30.05 | v63.42,30.05 | v63.42,30.05 | v63.42,30.05 | v63.42,30.05 | v63.42,30.05 | v63.42,30.05 | v63.42,30.05 | v63.42,30.05 | v63.42,30.05 | v63.42,30.05 | v63.42,30.05 | v63.42,30.05 | v63.42,30.05 | v63.42,30.05 | v63.42,30.05 | v63.42,30.05 | v63.42,30.05 | v63.42,30.05 | v63.42,30.05 | v63.42,30.05 | v63.42,30.05 | v63.42,30.05 | v63.42,30.05 | v63.42,30.05 | v63.42,30.05 | v63.42,30.05 | v63.42,30.05 | v63.42,30.05 | v63.42,30.05 | v63.42,30.05 | v63.42,30.05 | v63.42,30.05 | v63.42,30.05 | v63.42,30.05 | v63.42,30.05 | v63.42,30.05 | v63.42,30.05 | v63.42,30.05 | v63.42,30.05 | v63.42,30.05 | v63.42,30.05 | v63.42,30.05 | v63.42,30.05 | v63.42,30.05 | v63.42,30.05 | v63.42,30.05 | v63.42,30.05 | v63.42,30.05 | v63.42,30.05 | v63.42,30.05 | v63.42,30.05 | v63.42,30.05 | v63.42,30.05 | v63.42,30.05 | v63.42,30.05 | v63.42,30.05 | v63.42,30.05 | v63.42,30.05 | v63.42,30.05 | v63.42,30.05 | v63.42,30.05 | v63.42,30.05 | v63.42,30.05 | v63.42,30.05 | v63.42,30.05 | v63.42,30.05 | v63.42,30.05 | v63.42,30.05 | v63.42,30.05 | v63.42,30.05 | v63.42,30.05 | v63.42,30.05 | v63.42,30.05 | v63.42,30.05 | v63.42,30.05 | v63.42,30.05 | v63.42,30.05 | v63.42,30.05
  Bottom 0.152: v63.42,30.05 | v63.42,30.05 | v63.42,30.05 | v63.42,30.05 | v63.42,30.05 | v63.42,30.05 | v63.42,30.05 | v63.42,30.05 | v63.42,30.05 | v63.42,30.05 | v63.42,30.05 | v63.42,30.05 | v63.42,30.05 | v63.42,30.05 | v63.42,30.05 | v63.42,30.05 | v63.42,30.05 | v63.42,30.05 | v63.42,30.05 | v63.42,30.05 | v63.42,30.05 | v63.42,30.05 | v63.42,30.05 | v63.42,30.05 | v63.42,30.05 | v63.42,30.05 | v63.42,30.05 | v63.42,30.05 | v63.42,30.05 | v63.42,30.05 | v63.42,30.05 | v63.42,30.05 | v63.42,30.05 | v63.42,30.05 | v63.42,30.05 | v63.42,30.05 | v63.42,30.05 | v63.42,30.05 | v63.42,30.05 | v63.42,30.05 | v63.42,30.05 | v63.42,30.05 | v63.42,30.05 | v63.42,30.05 | v63.42,30.05 | v63.42,30.05 | v63.42,30.05 | v63.42,30.05 | v63.42,30.05 | v63.42,30.05 | v63.42,30.05 | v63.42,30.05 | v63.42,30.05 | v63.42,30.05 | v63.42,30.05 | v63.42,30.05 | v63.42,30.05 | v63.42,30.05 | v63.42,30.05 | v63.42,30.05 | v63.42,30.05 | v63.42,30.05 | v63.42,30.05 | v63.42,30.05 | v63.42,30.05 | v63.42,30.05 | v63.42,30.05 | v63.42,30.05 | v63.42,30.05 | v63.42,30.05 | v63.42,30.05 | v63.42,30.05 | v63.42,30.05 | v63.42,30.05 | v63.42,30.05 | v63.42,30.05 | v63.42,30.05 | v63.42,30.05 | v63.42,30.05 | v63.42,30.05 | v63.42,30.05 | v63.42,30.05 | v63.42,30.05 | v63.42,30.05 | v63.42,30.05 | v63.42,30.05 | v63.42,30.05 | v63.42,30.05 | v63.42,30.05 | v63.42,30.05 | v63.42,30.05 | v63.42,30.05 | v63.42,30.05 | v63.42,30.05 | v63.42,30.05 | v63.42,30.05 | v63.42,30.05 | v63.42,30.05 | v63.42,30.05 | v63.42,30.05 | v63.42,30.05 | v63.42,30.05 | v63.42,30.05 | v63.42,30.05 | v63.42,30.05 | v63.42,30.05 | v63.42,30.05 | v63.42,30.05 | v63.42,30.05 | v63.42,30.05 | v63.42,30.05 | v63.42,30.05 | v63.42,30.05 | v63.42,30.05 | v63.42,30.05 | v63.42,30.05 | v63.42,30.05 | v63.42,30.05 | v63.42,30.05 | v63.42,30.05 | v63.42,30.05 | v63.42,30.05 | v63.42,30.05 | v63.42,30.05 | v63.42,30.05 | v63.42,30.05
  Bottom 0.152: v63.42,30.05 | v63.42,30.05 | v63.42,30.05 | v63.42,30.05 | v63.42,30.05 | v63.42,30.05 | v63.42,30.05 | v63.42,30.05 | v63.42,30.05 | v63.42,30.05 | v63.42,30.05 | v63.42,30.05 | v63.42,30.05 | v63.42,30.05 | v63.42,30.05 | v63.42,30.05 | v63.42,30.05 | v63.42,30.05 | v63.42,30.05 | v63.42,30.05 | v63.42,30.05 | v63.42,30.05 | v63.42,30.05 | v63.42,30.05 | v63.42,30.05 | v63.42,30.05 | v63.42,30.05 | v63.42,30.05 | v63.42,30.05 | v63.42,30.05 | v63.42,30.05 | v63.42,30.05 | v63.42,30.05 | v63.42,30.05 | v63.42,30.05 | v63.42,30.05 | v63.42,30.05 | v63.42,30.05 | v63.42,30.05 | v63.42,30.05 | v63.42,30.05 | v63.42,30.05 | v63.42,30.05 | v63.42,30.05 | v63.42,30.05 | v63.42,30.05 | v63.42,30.05 | v63.42,30.05 | v63.42,30.05 | v63.42,30.05 | v63.42,30.05 | v63.42,30.05 | v63.42,30.05 | v63.42,30.05 | v63.42,30.05 | v63.42,30.05 | v63.42,30.05 | v63.42,30.05 | v63.42,30.05 | v63.42,30.05 | v63.42,30.05 | v63.42,30.05 | v63.42,30.05 | v63.42,30.05 | v63.42,30.05 | v63.42,30.05 | v63.42,30.05 | v63.42,30.05 | v63.42,30.05 | v63.42,30.05 | v63.42,30.05 | v63.42,30.05 | v63.42,30.05 | v63.42,30.05 | v63.42,30.05 | v63.42,30.05 | v63.42,30.05 | v63.42,30.05 | v63.42,30.05 | v63.42,30.05 | v63.42,30.05 | v63.42,30.05 | v63.42,30.05 | v63.42,30.05 | v63.42,30.05 | v63.42,30.05 | v63.42,30.05 | v63.42,30.05 | v63.42,30.05 | v63.42,30.05 | v63.42,30.05 | v63.42,30.05 | v63.42,30.05 | v63.42,30.05 | v63.42,30.05 | v63.42,30.05 | v63.42,30.05 | v63.42,30.05 | v63.42,30.05 | v63.42,30.05 | v63.42,30.05 | v63.42,30.05 | v63.42,30.05 | v63.42,30.05 | v63.42,30.05 | v63.42,30.05 | v63.42,30.05 | v63.42,30.05 | v63.42,30.05 | v63.42,30.05 | v63.42,30.05 | v63.42,30.05 | v63.42,30.05 | v63.42,30.05 | v63.42,30.05 | v63.42,30.05 | v63.42,30.05 | v63.42,30.05 | v63.42,30.05 | v63.42,30.05 | v63.42,30.05 | v63.42,30.05 | v63.42,30.05 | v63.42,30.05 | v63.42,30.05 | v63.42,30.05
  Bottom 0.152: v63.42,30.05 | v63.42,30.05 | v63.42,30.05 | v63.42,30.05 | v63.42,30.05 | v63.42,30.05 | v63.42,30.05 | v63.42,30.05 | v63.42,30.05 | v63.42,30.05 | v63.42,30.05 | v63.42,30.05 | v63.42,30.05 | v63.42,30.05 | v63.42,30.05 | v63.42,30.05 | v63.42,30.05 | v63.42,30.05 | v63.42,30.05 | v63.42,30.05 | v63.42,30.05 | v63.42,30.05 | v63.42,30.05 | v63.42,30.05 | v63.42,30.05 | v63.42,30.05 | v63.42,30.05 | v63.42,30.05 | v63.42,30.05 | v63.42,30.05 | v63.42,30.05 | v63.42,30.05 | v63.42,30.05 | v63.42,30.05 | v63.42,30.05 | v63.42,30.05 | v63.42,30.05 | v63.42,30.05 | v63.42,30.05 | v63.42,30.05 | v63.42,30.05 | v63.42,30.05 | v63.42,30.05 | v63.42,30.05 | v63.42,30.05 | v63.42,30.05 | v63.42,30.05 | v63.42,30.05 | v63.42,30.05 | v63.42,30.05 | v63.42,30.05 | v63.42,30.05 | v63.42,30.05 | v63.42,30.05 | v63.42,30.05 | v63.42,30.05 | v63.42,30.05 | v63.42,30.05 | v63.42,30.05 | v63.42,30.05 | v63.42,30.05 | v63.42,30.05 | v63.42,30.05 | v63.42,30.05 | v63.42,30.05 | v63.42,30.05 | v63.42,30.05 | v63.42,30.05 | v63.42,30.05 | v63.42,30.05 | v63.42,30.05 | v63.42,30.05 | v63.42,30.05 | v63.42,30.05 | v63.42,30.05 | v63.42,30.05 | v63.42,30.05 | v63.42,30.05 | v63.42,30.05 | v63.42,30.05 | v63.42,30.05 | v63.42,30.05 | v63.42,30.05 | v63.42,30.05 | v63.42,30.05 | v63.42,30.05 | v63.42,30.05 | v63.42,30.05 | v63.42,30.05 | v63.42,30.05 | v63.42,30.05 | v63.42,30.05 | v63.42,30.05 | v63.42,30.05 | v63.42,30.05 | v63.42,30.05 | v63.42,30.05 | v63.42,30.05 | v63.42,30.05 | v63.42,30.05 | v63.42,30.05 | v63.42,30.05 | v63.42,30.05 | v63.42,30.05 | v63.42,30.05 | v63.42,30.05 | v63.42,30.05 | v63.42,30.05 | v63.42,30.05 | v63.42,30.05 | v63.42,30.05 | v63.42,30.05 | v63.42,30.05 | v63.42,30.05 | v63.42,30.05 | v63.42,30.05 | v63.42,30.05 | v63.42,30.05 | v63.42,30.05 | v63.42,30.05 | v63.42,30.05 | v63.42,30.05 | v63.42,30.05 | v63.42,30.05 | v63.42,30.05 | v63.42,30.05
  Bottom 0.152: v63.42,30.05 | v63.42,30.05 | v63.42,30.05 | v63.42,30.05 | v63.42,30.05 | v63.42,30.05 | v63.42,30.05 | v63.42,30.05 | v63.42,30.05 | v63.42,30.05 | v63.42,30.05 | v63.42,30.05 | v63.42,30.05 | v63.42,30.05 | v63.42,30.05 | v63.42,30.05 | v63.42,30.05 | v63.42,30.05 | v63.42,30.05 | v63.42,30.05 | v63.42,30.05 | v63.42,30.05 | v63.42,30.05 | v63.42,30.05 | v63.42,30.05 | v63.42,30.05 | v63.42,30.05 | v63.42,30.05 | v63.42,30.05 | v63.42,30.05 | v63.42,30.05 | v63.42,30.05 | v63.42,30.05 | v63.42,30.05 | v63.42,30.05 | v63.42,30.05 | v63.42,30.05 | v63.42,30.05 | v63.42,30.05 | v63.42,30.05 | v63.42,30.05
VDD_3V3
  Top 0.254: R15.2 17.64,5.34 16.72,4.42 S2.2 | J6.1 60.85,44.74 61.49,45.38 63.68,45.38 R9.2
  Top 0.381: U1.5 33.39,15.21 33.55,15.37 34.5,15.37 C9.1 | U5.2 6.22,52.49 C22.1 8.98,54.38 13.86,49.5 R1.1 | U4.16 C14.1 | C14.1 | C14.1 65.93,22.52 C13.1 | C14.1 64.66,23.47 64.35,23.78 58.31,23.78 57.99,23.47 57.99,17.91 54.5,14.42 J7.1 | R15.2 R16.2 | R16.2
  Top 0.508: M1.2 C3.1 | C3.1 | C3.1 C2.1 | C2.1 | C2.1 R1.1 | R1.1 | 44.34,15.21 R6.2 44.34,32.99 48.15,32.99 52.76,37.6 55.45,37.6 57.2,39.34 57.2,41.09 60.85,44.74 J6.1
  Top 0.635: R16.2 45.19,5.34 45.9,6.04
  Top 0.762: M1.2 25.45,49.5 26.56,48.39 26.56,35.06 25.77,34.26 25.77,30.93 34.5,22.2 C9.1 44.03,15.53 44.34,15.21 45.3,14.26 45.3,6.64 45.9,6.04 46.88,5.05 J7.4
  Bottom 0.381: J7.3 J10.1 | J10.1
  Bottom 0.762: J7.1 J7.2 J7.3 J7.4
VDD_5V0
  Top 0.254: R2.2 C6.1 | C6.1 | C6.1 D1.1
  Top 0.381: R3.2 31.66,10.77
  Top 0.508: D1.1 C7.1 C8.1 | D1.1 | C8.1 | U1.1 C8.1 | C8.1 | J9.8 38.3,10.77 | 38.3,10.77 33.22,10.77 | 33.22,10.77 31.66,10.77 29.42,10.77 28.79,11.4 C8.1 | J9.6 33.22,10.77 | D6.1 43.39,10.77 43.38,10.77 | 43.38,10.77 J9.10 | 38.3,10.77 43.38,10.77
  Bottom 0.381: J9.8 38.3,17.45 35.29,20.45 35.29,24.42 J4.5
VDD_36V
  Top 0.508: U2.5 17.07,22.83 R4.2 16.43,22.8 16.09,23.15 16.09,25.37 17.36,26.64 C11.1
  Top 1.016: C11.1 C10.1 | C10.1 | C10.1 19.26,31.25 18.78,31.72 D3.1
VDD_USB
  Top 0.254: U3.8 52.55,33.94 | 52.55,33.94 52.55,34.85 52.92,35.21 C16.1 | U3.7 54.33,31.86 54.5,32.04 54.5,33.63 54.19,33.94 52.55,33.94
  Top 0.381: J3.B4A9 61.42,32.68 62.28,32.68 62.6,32.36 63.55,32.36 64.19,31.72 64.19,28.86 63.55,28.23 62.6,28.23 62.28,27.91 61.48,27.91 J3.A4B9
  Top 0.508: J3.B4A9 59.83,32.75 57.36,35.21 C15.1 C16.1 | C16.1 | J3.A4B9 54.76,27.85 50.06,23.15 50.06,12.99 49.42,12.35 D6.2

## Text on the board
tPlace: POWER | RESET | - + | BTN
bPlace: OSSM rev.2.0 | Sept 2021 | - | +